# Altium PCB PCB_L1.PcbDoc
Units mm, origin at the board's own origin, x right, y up, seen from the top; angles counter-clockwise.
Board outline 71 x 165 mm, 2 copper layers (Top Layer, Bottom Layer), stack 1.57 mm thick; 38 components, 83 nets, 252 pads, 12 vias.
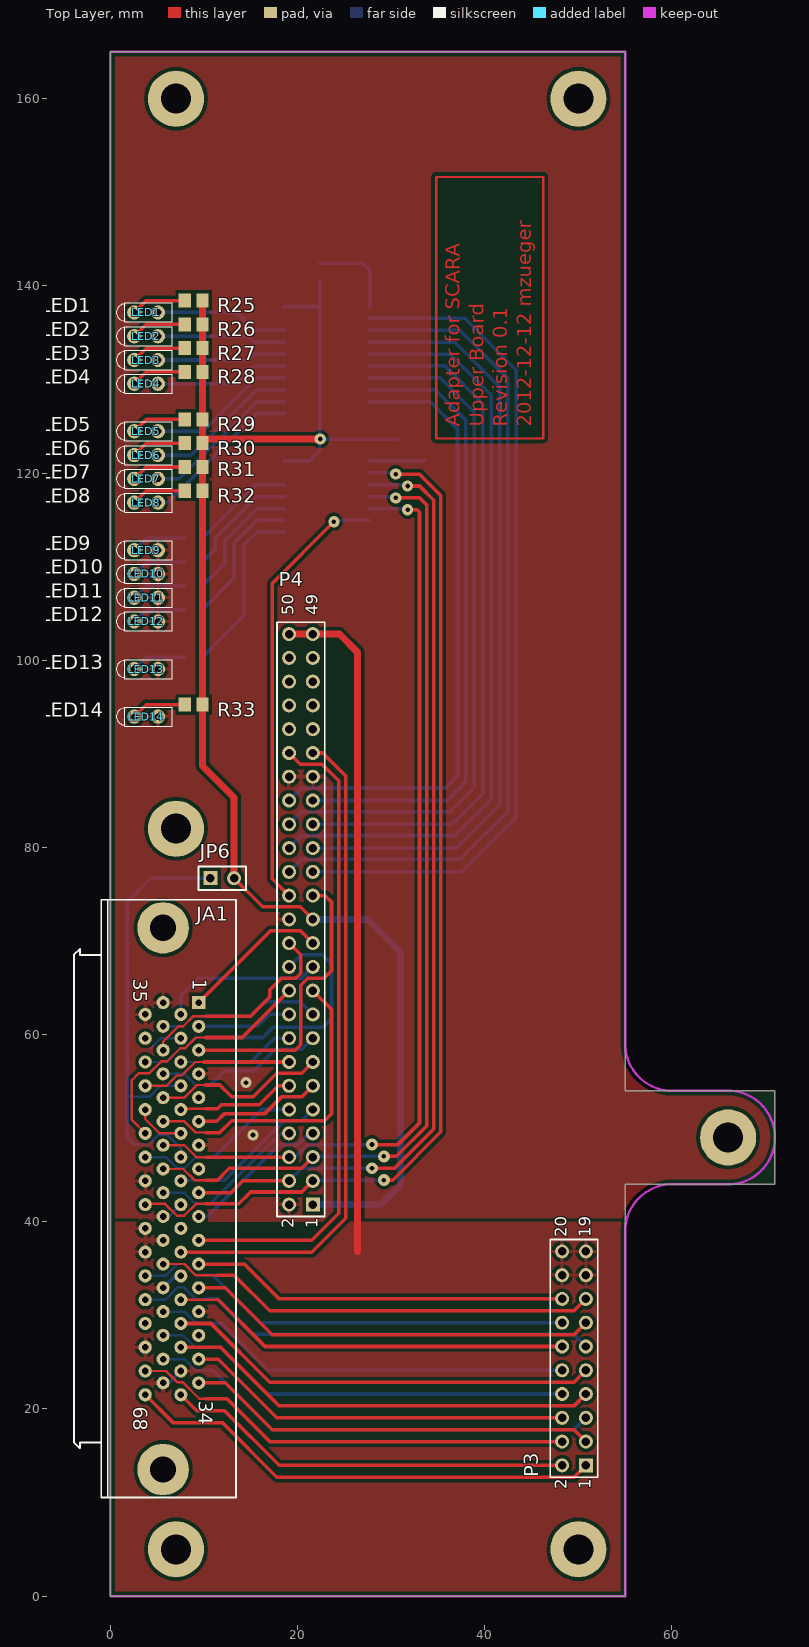
[diagram p0: Top Layer view]
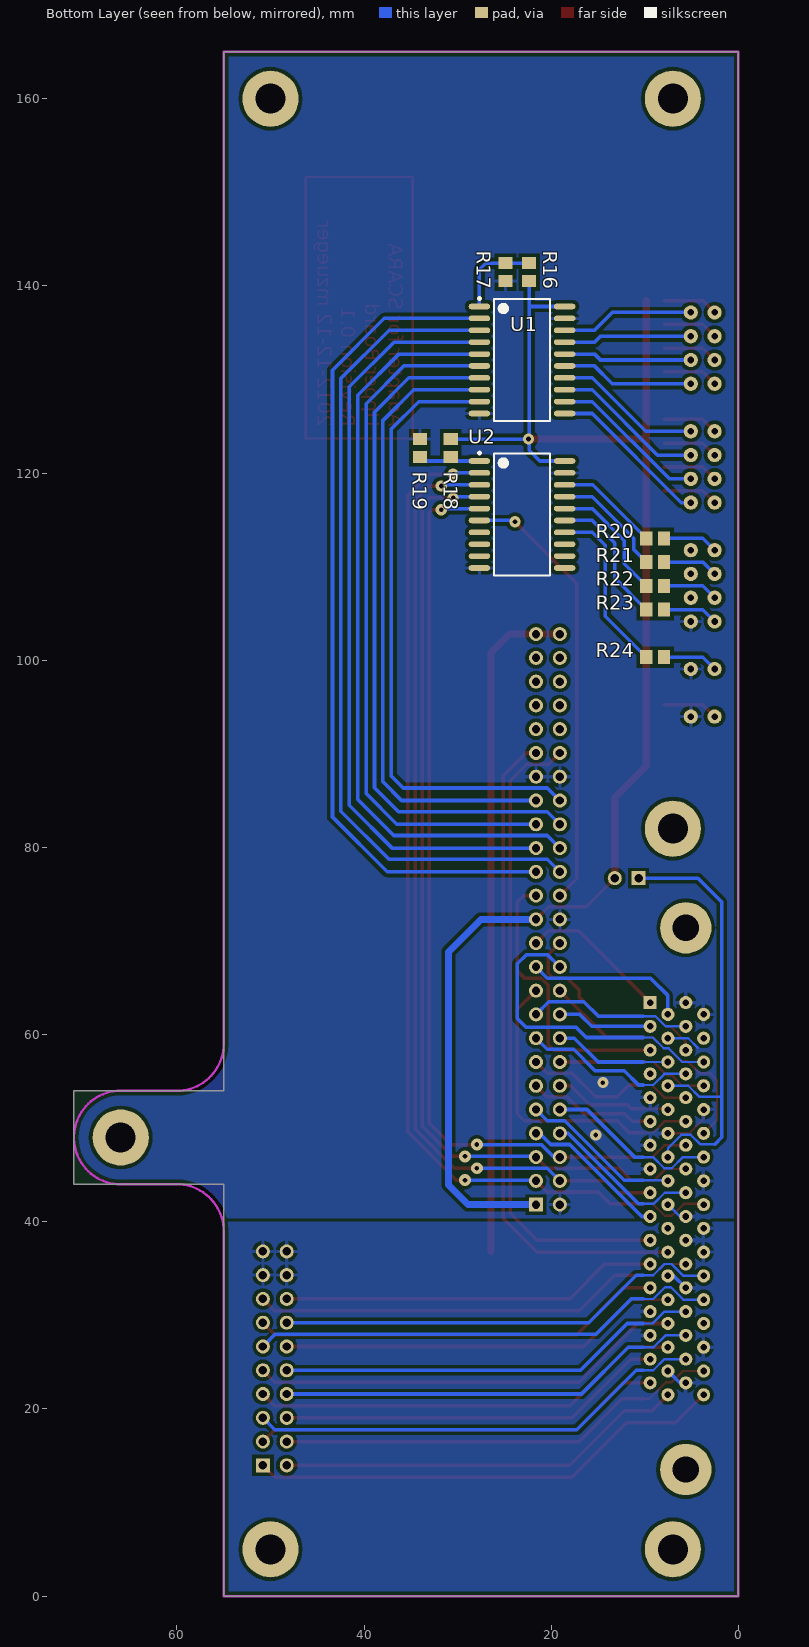
[diagram p1: Bottom Layer view, seen from below]

## Layer stack, top to bottom
Top Layer: signal copper 0.035
Dielectric: core 1.5, FR-4, Dk 4.8
Bottom Layer: signal copper 0.035

## Board outline
0,0 0,165 55,165 55,55 55,54 71,54 71,44 55,44 55,0

## Design rules (kind name [scope] priority, off if disabled: settings)
Clearance Polygon [InPolygon] p1: gap=0.381 // General Polygon Clearance
Clearance [All] p2: gap=0.254
FabricationTestPointUsage TestPointUsage [All] p1 off: valid=0 allowmultiple=FALSE
FabricationTestpoint Testpoint [All] p1 off: side=3 testpointundercomponent=TRUE minsize=1.016 maxsize=2.54 preferedsize=1.524 minholesize=0 maxholesize=1.016 preferedholesize=0.813 testpointgrid=0.025 allowsidetop=TRUE allowsidebottom=TRUE usegrid=TRUE gridtolerance=0
FanoutControl Fanout_BGA [IsBGA] p1 off: bgadir=Out bgaviamode=Centered fanoutstyle=Auto fanoutdirection=Alternating viagrid=0.025 // Fanout_BGA (Default Rule)
FanoutControl Fanout_LCC [IsLCC] p2 off: bgadir=Out bgaviamode=Centered fanoutstyle=Auto fanoutdirection=Alternating viagrid=0.025 // Fanout_LCC (Default Rule)
FanoutControl Fanout_SOIC [IsSOIC] p3 off: bgadir=Out bgaviamode=Centered fanoutstyle=Auto fanoutdirection=Alternating viagrid=0.025 // Fanout_SOIC (Default Rule)
FanoutControl Fanout_Small [(CompPinCount < 5)] p4 off: bgadir=Out bgaviamode=Centered fanoutstyle=Auto fanoutdirection=OutThenIn viagrid=0.025 // Fanout_Small (Default Rule)
FanoutControl Fanout_Default [All] p5 off: bgadir=Out bgaviamode=Centered fanoutstyle=Auto fanoutdirection=Alternating viagrid=0.025 // Fanout_Default (Default Rule)
Height [All] p1 off: minheight=0 maxheight=25.4 prefheight=12.7
HoleSize HoleType [IsPad And HasSquareHole] p1: absolutevalues=TRUE maxlimit=0 minlimit=0 maxpercent=80.000 minpercent=20.000 // Find Square Holes
HoleSize [All] p2: absolutevalues=TRUE maxlimit=5 minlimit=0.4 maxpercent=80.000 minpercent=20.000
LayerPairs [All] p1 off: enforce=TRUE
MinimumAnnularRing "Minimum Annular Ring" [All] p1: minimumring=0.2
PasteMaskExpansion [All] p1: expansion=0.05
PolygonConnect PolygonConnectVia [IsVia] p1: connectstyle=Direct reliefconductorwidth=0.254 reliefentries=4 polygonreliefangle="90 Angle" // Direct Connect Via
PolygonConnect [All] p2: connectstyle=Relief reliefconductorwidth=0.381 reliefentries=4 polygonreliefangle="90 Angle"
RoutingCorners [All] p1 off: cornerstyle=45-Degree minsetback=2.54 maxsetback=2.54
RoutingLayers [All] p1 off: top layer_v5=TRUE bottom layer_v5=TRUE
RoutingPriority [All] p1 off: routingpriority=0
RoutingTopology [All] p1 off: topology=Shortest
RoutingVias [All] p1: holewidth=0.4 width=0.6 viastyle="Through Hole" minholewidth=0.3 minwidth=0.7 maxholewidth=2 maxwidth=3.4
SignalStimulus "#Version Information" [All] p1 off: kind=1 level=0 starttime=10.00n stoptime=60.00n periodtime=100.00n // Version 0-9 from 2010-11-01
SilkToSilkClearance [All] p1 off: silktosilkclearance=0.254
SilkscreenOverComponentPads [All] p1: minsilkscreentomaskgap=0
SolderMaskExpansion [All] p1: expansion=0.05
Width [All] p1: maxlimit=2.54 minlimit=0.254 preferedwidth=0.254 minimp=50.000000 maximp=50.000000 favimp=50.000000
11 further rules are at their usual default settings.

## Components (designator, comment, footprint, x,y, rotation, side; value= is the part's Value field where it differs from the comment)
JA1 "har.mik" "HAR-MIK P/S 68 SA" 9.43,63.42 r270 top
JP6 "Header 1x2" "Header - 1x2 - V" 10.668,76.708 r0 top
LED1 "yellow" KM2520 2.54,137.16 r0 top
LED2 "yellow" KM2520 2.54,134.62 r0 top
LED3 "yellow" KM2520 2.54,132.08 r0 top
LED4 "yellow" KM2520 2.54,129.54 r0 top
LED5 "green" KM2520 2.54,124.46 r0 top
LED6 "green" KM2520 2.54,121.92 r0 top
LED7 "green" KM2520 2.54,119.38 r0 top
LED8 "green" KM2520 2.54,116.84 r0 top
LED9 "red" KM2520 2.54,111.76 r0 top
LED10 "red" KM2520 2.54,109.22 r0 top
LED11 "red" KM2520 2.54,106.68 r0 top
LED12 "red" KM2520 2.54,104.14 r0 top
LED13 "red" KM2520 2.54,99.06 r0 top
LED14 "red" KM2520 2.54,93.98 r0 top
P3 "Header 2x10" "Header - 2x10 - V" 50.8,13.97 r90 top
P4 "Header 2x25" "Header - 2x25 - V" 21.622,41.83 r90 top
R16 "0E" 0805 22.352,141.478 r270 bottom
R17 "N/A" 0805 24.892,141.478 r90 bottom
R18 "0E" 0805 30.734,122.682 r90 bottom
R19 "N/A" 0805 34.036,122.682 r270 bottom
R20 "???" 0805 8.89,113.03 r180 bottom
R21 "???" 0805 8.89,110.49 r180 bottom
R22 "???" 0805 8.89,107.95 r180 bottom
R23 "???" 0805 8.89,105.41 r180 bottom
R24 "???" 0805 8.89,100.33 r180 bottom
R25 "???" 0805 8.89,138.43 r0 top
R26 "???" 0805 8.89,135.89 r0 top
R27 "???" 0805 8.89,133.35 r0 top
R28 "???" 0805 8.89,130.81 r0 top
R29 "???" 0805 8.89,125.73 r0 top
R30 "???" 0805 8.89,123.19 r0 top
R31 "???" 0805 8.89,120.65 r0 top
R32 "???" 0805 8.89,118.11 r0 top
R33 "???" 0805 8.89,95.25 r0 top
U1 "SN74HCT640M" DW020_N 23.114,132.08 r180 bottom
U2 "SN74HCT640M" DW020_N 23.114,115.57 r180 bottom

## Footprints (in the part's own frame and the unit in brackets; to place one, negate y for a bottom-side part, rotate by r counter-clockwise, add the part's x,y. Pads: shape width x height; smd on the part's side, far side on the other; paste and mask are expansions set on the pad)
0805 [mm] "SMD Chip 0805 mil or 2012 mm"
  rect 1.3x1.5 smd: 1(-0.95,0) 2(0.95,0)
DW020_N [mm] "SOIC, 20-Leads, Body 12.8x7.5mm, Pitch 1.27mm, IPC Medium Density"
  oval 2.3x0.6 smd: 1(-4.55,5.715) 2(-4.55,4.445) 3(-4.55,3.175) 4(-4.55,1.905) 5(-4.55,0.635) 6(-4.55,-0.635) 7(-4.55,-1.905) 8(-4.55,-3.175) 9(-4.55,-4.445) 10(-4.55,-5.715) 11(4.55,-5.715) 12(4.55,-4.445) 13(4.55,-3.175) 14(4.55,-1.905) 15(4.55,-0.635) 16(4.55,0.635) 17(4.55,1.905) 18(4.55,3.175) 19(4.55,4.445) 20(4.55,5.715)
  silkscreen extent -4.67,-6.5 3,6.69, body extent -3.75,-6.4 3.75,6.4, height 2.65
"HAR-MIK P/S 68 SA" [mm] "HAR-MIK P/S Connector, 68 Pin, 90 deg"
  rect 1.4x1.4 hole 0.7: 1(0,0)
  round 1.4 hole 0.7: 2(1.27,-1.905) 3(2.54,0) 4(3.81,-1.905) 5(5.08,0) 6(6.35,-1.905) 7(7.62,0) 8(8.89,-1.905) 9(10.16,0) 10(11.43,-1.905) 11(12.7,0) 12(13.97,-1.905) 13(15.24,0) 14(16.51,-1.905) 15(17.78,0) 16(19.05,-1.905) 17(20.32,0) 18(21.59,-1.905) 19(22.86,0) 20(24.13,-1.905) 21(25.4,0) 22(26.67,-1.905) 23(27.94,0) 24(29.21,-1.905) 25(30.48,0) 26(31.75,-1.905) 27(33.02,0) 28(34.29,-1.905) 29(35.56,0) 30(36.83,-1.905) 31(38.1,0) 32(39.37,-1.905) 33(40.64,0) 34(41.91,-1.905) 35(0,-3.81) 36(1.27,-5.715) 37(2.54,-3.81) 38(3.81,-5.715) 39(5.08,-3.81) 40(6.35,-5.715) 41(7.62,-3.81) 42(8.89,-5.715) 43(10.16,-3.81) 44(11.43,-5.715) 45(12.7,-3.81) 46(13.97,-5.715) 47(15.24,-3.81) 48(16.51,-5.715) 49(17.78,-3.81) 50(19.05,-5.715) 51(20.32,-3.81) 52(21.59,-5.715) 53(22.86,-3.81) 54(24.13,-5.715) 55(25.4,-3.81) 56(26.67,-5.715) 57(27.94,-3.81) 58(29.21,-5.715) 59(30.48,-3.81) 60(31.75,-5.715) 61(33.02,-3.81) 62(34.29,-5.715) 63(35.56,-3.81) 64(36.83,-5.715) 65(38.1,-3.81) 66(39.37,-5.715) 67(40.64,-3.81) 68(41.91,-5.715)
  round 5.5 hole 2.8: ""(-7.985,-3.81) ""(49.895,-3.81)
  silkscreen extent -10.98,-13.33 52.89,3.97
"Header - 1x2 - V" [mm] "Connector; Header; 1x2"
  rect 1.5x1.5 hole 0.9: 1(0,0)
  round 1.5 hole 0.9: 2(2.54,0)
  silkscreen extent -1.27,-1.27 3.81,1.27
"Header - 2x10 - V" [mm] "Connector; Header; 10x2 Position"
  rect 1.5x1.5 hole 0.9: 1(0,0)
  round 1.5 hole 0.9: 2(0,2.54) 3(2.54,0) 4(2.54,2.54) 5(5.08,0) 6(5.08,2.54) 7(7.62,0) 8(7.62,2.54) 9(10.16,0) 10(10.16,2.54) 11(12.7,0) 12(12.7,2.54) 13(15.24,0) 14(15.24,2.54) 15(17.78,0) 16(17.78,2.54) 17(20.32,0) 18(20.32,2.54) 19(22.86,0) 20(22.86,2.54)
  silkscreen extent -1.27,-1.27 24.13,3.81
"Header - 2x25 - V" [mm] "Connector; Header; 2x25"
  rect 1.5x1.5 hole 0.9: 1(0,0)
  round 1.5 hole 0.9: 2(0,2.54) 3(2.54,0) 4(2.54,2.54) 5(5.08,0) 6(5.08,2.54) 7(7.62,0) 8(7.62,2.54) 9(10.16,0) 10(10.16,2.54) 11(12.7,0) 12(12.7,2.54) 13(15.24,0) 14(15.24,2.54) 15(17.78,0) 16(17.78,2.54) 17(20.32,0) 18(20.32,2.54) 19(22.86,0) 20(22.86,2.54) 21(25.4,0) 22(25.4,2.54) 23(27.94,0) 24(27.94,2.54) 25(30.48,0) 26(30.48,2.54) 27(33.02,0) 28(33.02,2.54) 29(35.56,0) 30(35.56,2.54) 31(38.1,0) 32(38.1,2.54) 33(40.64,0) 34(40.64,2.54) 35(43.18,0) 36(43.18,2.54) 37(45.72,0) 38(45.72,2.54) 39(48.26,0) 40(48.26,2.54) 41(50.8,0) 42(50.8,2.54) 43(53.34,0) 44(53.34,2.54) 45(55.88,0) 46(55.88,2.54) 47(58.42,0) 48(58.42,2.54) 49(60.96,0) 50(60.96,2.54)
  silkscreen extent -1.27,-1.27 62.23,3.81
KM2520 [mil] "Kinbright KM2520 single"
  round 60 hole 27.56: 1(100,0) 2(0,0)
  silkscreen extent -75,-40 160,40

## Part data
JA1: library part "Connector 68", "TB 60 01 068 5232"
JP6: library part Jumper
LED1 LED2 LED3 LED4 LED5 LED6 LED7 LED8 LED9 LED10 LED11 LED12 LED13 LED14: library part LED, "Typical LED"
P3: "Header, 10-Pin, Dual row"
P4: "Header, 25-Pin, Dual row"
R16 R17 R18 R19 R20 R21 R22 R23 R24 R25 R26 R27 R28 R29 R30 R31 R32 R33: library part R, "Resistor"
U1 U2: library part SN74HCT640DW, "Octal Bus Transceiver with 3-State Outputs"

## Free pads (board coordinates)
  round 6 hole 3.2: 0(7,5) 0(7,82) 0(7,160) 0(50,5) 0(50,160) 0(66,49)

## Via types
v1: diameter 1.2, hole 0.5, Top Layer to Bottom Layer, 8 vias
v2: diameter 1.27, hole 0.5, Top Layer to Bottom Layer, 4 vias

## Nets (pads, with @x,y where several pads share a name; then routed paths per layer and width w, separated by ;. In a path a pad name is that pad's centre, name@x,y a point inside that pad or via, vN(x,y) a via of type N, cw(c..) or ccw(c..) an arc to the next point about the centre after c; other vN are vias at no path point)
AGND: JA1.24 JA1.27 JA1.29 JA1.32 JA1.54 JA1.55 JA1.56 JA1.59 JA1.64 JA1.67 P3.17 P3.18 P3.19 P3.20 P4.49 P4.50 | length 77
  Top Layer w0.762: P4.50 P4.49 24.464,102.79 26.416,100.838 26.416,36.83
  Bottom Layer w0.381: JA1.67 6.255,22.78 JA1.32 ; JA1.59 6.89,34.21 JA1.24
BRAKE_1: P4.29 U1.2 | length 89.9
  Bottom Layer w0.381: P4.29 37.512,77.39 43.37,83.248 43.37,131 37.845,136.525 U1.2
BRAKE_2: P4.30 U1.3 | length 89.2
  Bottom Layer w0.381: P4.30 20.42,78.728 37.326,78.728 42.472,83.874 42.472,130.102 37.319,135.255 U1.3
BRAKE_3: P4.31 U1.4 | length 82.4
  Bottom Layer w0.381: P4.31 37.004,79.93 41.574,84.5 41.574,129.204 36.793,133.985 U1.4
BRAKE_4: P4.32 U1.5 | length 81.8
  Bottom Layer w0.381: P4.32 20.42,81.268 36.818,81.268 40.676,85.126 40.676,128.306 36.267,132.715 U1.5
DGND: JA1.4 JA1.7 JA1.9 JA1.12 JA1.13 JA1.15 JA1.18 JA1.35 JA1.36 JA1.44 JA1.50 JA1.53 LED9.1 LED10.1 LED11.1 LED12.1 LED13.1 LED14.1 P4.2 P4.26 P4.37 P4.38 R17.1 R19.1 U1.10 U1.19 U2.10 U2.19 | length 11.5
  Top Layer w0.254: JA1.44 3.715,50.979 5.244,49.45 JA1.12
  Bottom Layer w0.254: 4.318,58.567 5.361,59.61 JA1.4 ; JA1.53 6.255,40.56 JA1.18
  other v1: 15.24,49.276 14.478,54.864
EN_1: P4.33 U1.6 | length 75
  Bottom Layer w0.381: P4.33 36.496,82.47 39.778,85.752 39.778,127.408 35.741,131.445 U1.6
EN_2: P4.34 U1.7 | length 74.3
  Bottom Layer w0.381: P4.34 20.42,83.808 36.31,83.808 38.88,86.378 38.88,126.51 35.215,130.175 U1.7
EN_3: P4.35 U1.8 | length 67.5
  Bottom Layer w0.381: P4.35 35.988,85.01 37.982,87.004 37.982,125.612 34.689,128.905 U1.8
EN_4: P4.36 U1.9 | length 66.8
  Bottom Layer w0.381: P4.36 20.42,86.348 35.802,86.348 37.084,87.63 37.084,124.714 34.163,127.635 U1.9
ENDSW+_1: JA1.19 P4.7 | length 15.9
  Bottom Layer w0.381: JA1.19 10.334,40.56 18.029,48.255 20.061,48.255 21.256,49.45 P4.7
ENDSW+_2: JA1.16 P4.9 | length 17.1
  Bottom Layer w0.254: JA1.16@7.605,44.45 10.16,44.45
  Bottom Layer w0.381: 10.16,44.45 12.192,44.45 18.537,50.795 20.427,50.795 P4.9
ENDSW+_3: JA1.11 P4.11 | length 13.8
  Top Layer w0.381: JA1.11 11.35,50.72 12.192,51.562 16.51,51.562 18.283,53.335 20.427,53.335 P4.11
ENDSW+_4: JA1.43 P4.13 | length 18.6
  Top Layer w0.254: JA1.43 7.901,53.26 9.251,54.61 10.16,54.61
  Top Layer w0.381: 10.16,54.61 11.684,54.61 12.954,53.34 15.24,53.34 17.775,55.875 20.427,55.875 P4.13
ENDSW-_1: JA1.51 P4.8 | length 17.1
  Bottom Layer w0.254: JA1.51 7.874,43.1 9.064,41.91 10.16,41.91
  Bottom Layer w0.381: 10.16,41.91 10.668,41.91 18.208,49.45 P4.8
ENDSW-_2: JA1.48 P4.10 | length 18.5
  Bottom Layer w0.254: JA1.48 5.922,46.91 7.112,45.72 7.927,45.72 9.117,46.91 10.16,46.91
  Bottom Layer w0.381: 10.16,46.91 11.101,46.91 16.181,51.99 P4.10
ENDSW-_3: JA1.10 P4.12 | length 12.5
  Top Layer w0.254: JA1.10@7.605,52.07 10.16,52.07
  Top Layer w0.381: 10.16,52.07 11.43,52.07 11.849,52.489 15.899,52.489 17.94,54.53 P4.12
ENDSW-_4: JA1.42 P4.14 | length 16.4
  Top Layer w0.254: JA1.42 5.996,54.53 7.092,55.626 7.62,55.626 9.064,57.07 9.986,57.07
  Top Layer w0.381: 9.986,57.07 P4.14
ENSD_1: JA1.37 P4.17 | length 17.6
  Bottom Layer w0.254: JA1.37 7.784,60.88 8.88,61.976 10.16,61.976
  Bottom Layer w0.381: 10.16,61.976 14.986,61.976 16.505,63.495 20.276,63.495 P4.17
ENSD_2: JA1.3 P4.18 | length 10.2
  Bottom Layer w0.381: JA1.3 15.668,60.88 16.938,62.15 P4.18
ENSD_3: JA1.45 P4.19 | length 33.3
  Top Layer w0.254: JA1.45 7.901,50.72 9.091,49.53 10.16,49.53
  Top Layer w0.381: 10.16,49.53 11.684,49.53 12.949,50.795 22.887,50.795 23.622,51.53 23.622,62.69 P4.19
ENSD_4: JA1.46 P4.20 | length 27
  Top Layer w0.254: JA1.46 2.286,50.879 2.286,55.118 3.048,55.88 4.171,55.88 5.441,57.15 6.076,57.15 7.455,58.529 7.973,58.529 9.134,59.69 10.16,59.69
  Top Layer w0.381: 10.16,59.69 14.082,59.69 P4.20
GRIPPER_CLOSE: JA1.6 P4.16 | length 12.6
  Bottom Layer w0.254: JA1.6 10.16,57.07
  Bottom Layer w0.381: 10.16,57.07 14.986,57.07 17.526,59.61 P4.16
GRIPPER_OPEN: JA1.41 P4.15 | length 18.6
  Bottom Layer w0.254: JA1.41 7.901,55.8 9.091,54.61 10.16,54.61
  Bottom Layer w0.381: 10.16,54.61 10.668,54.61 12.192,56.134 15.32,56.134 17.601,58.415 20.427,58.415 P4.15
NetJA1_8: JA1.8 JA1.14 JP6.1 | length 49.3
  Bottom Layer w0.254: 1.778,53.34 4.171,53.34 5.361,54.53 JA1.8 ; 2.54,48.26 4.064,48.26 5.08,49.276 6.096,49.276 7.525,47.847 JA1.14
  Bottom Layer w0.381: 2.54,48.26 1.778,49.022 1.778,53.34 1.778,74.168 4.318,76.708 JP6.1
NetLED1_1: LED1.1 U1.18 | length 14.3
  Bottom Layer w0.381: LED1.1 13.462,137.16 15.367,135.255 U1.18
NetLED1_2: LED1.2 R25.1 | length 5.9
  Top Layer w0.381: LED1.2 3.81,138.43 R25.1
NetLED2_1: LED2.1 U1.17 | length 13.7
  Bottom Layer w0.381: LED2.1 14.732,134.62 15.367,133.985 U1.17
NetLED2_2: LED2.2 R26.1 | length 5.9
  Top Layer w0.381: LED2.2 3.81,135.89 R26.1
NetLED3_1: LED3.1 U1.16 | length 13.7
  Bottom Layer w0.381: LED3.1 14.732,132.08 15.367,132.715 U1.16
NetLED3_2: LED3.2 R27.1 | length 5.9
  Top Layer w0.381: LED3.2 3.81,133.35 R27.1
NetLED4_1: LED4.1 U1.15 | length 14.3
  Bottom Layer w0.381: LED4.1 13.462,129.54 15.367,131.445 U1.15
NetLED4_2: LED4.2 R28.1 | length 5.9
  Top Layer w0.381: LED4.2 3.81,130.81 R28.1
NetLED5_1: LED5.1 U1.14 | length 15.9
  Bottom Layer w0.381: LED5.1 9.906,124.46 15.621,130.175 U1.14
NetLED5_2: LED5.2 R29.1 | length 5.9
  Top Layer w0.381: LED5.2 3.81,125.73 R29.1
NetLED6_1: LED6.1 U1.13 | length 16.4
  Bottom Layer w0.381: LED6.1 8.636,121.92 15.621,128.905 U1.13
NetLED6_2: LED6.2 R30.1 | length 5.9
  Top Layer w0.381: LED6.2 3.81,123.19 R30.1
NetLED7_1: LED7.1 U1.12 | length 16.9
  Bottom Layer w0.381: LED7.1 7.366,119.38 15.621,127.635 U1.12
NetLED7_2: LED7.2 R31.1 | length 5.9
  Top Layer w0.381: LED7.2 3.81,120.65 R31.1
NetLED8_1: LED8.1 U1.11 | length 17.4
  Bottom Layer w0.381: LED8.1 6.096,116.84 15.621,126.365 U1.11
NetLED8_2: LED8.2 R32.1 | length 5.9
  Top Layer w0.381: LED8.2 3.81,118.11 R32.1
NetLED9_2: LED9.2 R20.2 | length 5.9
  Bottom Layer w0.381: LED9.2 3.81,113.03 R20.2
NetLED10_2: LED10.2 R21.2 | length 5.9
  Bottom Layer w0.381: LED10.2 3.81,110.49 R21.2
NetLED11_2: LED11.2 R22.2 | length 5.9
  Bottom Layer w0.381: LED11.2 3.81,107.95 R22.2
NetLED12_2: LED12.2 R23.2 | length 5.9
  Bottom Layer w0.381: LED12.2 3.81,105.41 R23.2
NetLED13_2: LED13.2 R24.2 | length 5.9
  Bottom Layer w0.381: LED13.2 3.81,100.33 R24.2
NetLED14_2: LED14.2 R33.1 | length 5.9
  Top Layer w0.381: LED14.2 3.81,95.25 R33.1
NetR16_1: R16.1 R17.2 U1.1 | length 9.6
  Bottom Layer w0.381: R16.1 26.99,142.428 27.686,141.732 U1.1@27.686,137.795
NetR18_1: R18.1 R19.2 U2.1 | length 5.9
  Bottom Layer w0.381: U2.1 R19.2@33.589,121.285
NetR20_1: R20.1 U2.18 | length 11.1
  Bottom Layer w0.381: R20.1 15.555,118.745 U2.18
NetR21_1: R21.1 U2.17 | length 12.3
  Bottom Layer w0.381: R21.1 11.176,111.826 11.176,113.03 15.621,117.475 U2.17
NetR22_1: R22.1 U2.16 | length 13.6
  Bottom Layer w0.381: R22.1 12.192,110.302 12.192,112.776 15.621,116.205 U2.16
NetR23_1: R23.1 U2.15 | length 14.9
  Bottom Layer w0.381: R23.1 13.208,108.778 13.208,112.522 15.621,114.935 U2.15
NetR24_1: R24.1 U2.14 | length 18.7
  Bottom Layer w0.381: R24.1 14.224,104.714 14.224,112.268 15.621,113.665 U2.14
RAI_B1: JA1.68 P3.1 | length 51.3
  Top Layer w0.381: JA1.68 6.683,18.542 11.938,18.542 17.78,12.7 49.53,12.7 P3.1
RAI_B2: JA1.33 P3.3 | length 44
  Top Layer w0.381: JA1.33 12.272,22.78 17.272,17.78 49.53,17.78 P3.3
RAI_B3: JA1.65 P3.5 | length 48.8
  Bottom Layer w0.254: JA1.65 7.901,25.32 9.091,24.13 10.16,24.13
  Bottom Layer w0.381: 10.16,24.13 10.922,24.13 17.272,17.78 49.53,17.78 P3.5
RAI_B4: JA1.30 P3.7 | length 46.4
  Top Layer w0.381: JA1.30 11.764,26.59 18.034,20.32 49.53,20.32 P3.7
RAI_B5: JA1.28 P3.9 | length 46.4
  Top Layer w0.381: JA1.28 10.748,29.13 17.018,22.86 49.53,22.86 P3.9
RAI_B6: JA1.60 P3.11 | length 50.3
  Bottom Layer w0.254: JA1.60 5.879,31.67 7.229,33.02 7.821,33.02 9.091,31.75 10.16,31.75
  Bottom Layer w0.381: 10.16,31.75 11.43,31.75 15.18,28 49.47,28 P3.11
RAI_B7: JA1.25 P3.13 | length 44
  Top Layer w0.381: JA1.25 12.272,32.94 17.272,27.94 49.53,27.94 P3.13
RAI_B8: JA1.57 P3.15 | length 47.8
  Top Layer w0.254: JA1.57 7.901,35.48 9.091,34.29 11.43,34.29
  Top Layer w0.381: 11.43,34.29 13.208,34.29 17.018,30.48 49.53,30.48 P3.15
RAI_B9: JA1.34 P3.2 | length 43.9
  Top Layer w0.381: JA1.34 9.223,19.812 12.192,19.812 18.034,13.97 P3.2
RAI_B10: JA1.66 P3.4 | length 47.7
  Top Layer w0.254: JA1.66 5.922,24.05 7.112,22.86 7.704,22.86 9.482,21.082 10.16,21.082
  Top Layer w0.381: 10.16,21.082 12.446,21.082 17.018,16.51 P3.4
RAI_B11: JA1.31 P3.6 | length 41.4
  Top Layer w0.381: JA1.31 11.51,25.32 17.78,19.05 P3.6
RAI_B12: JA1.63 P3.8 | length 45.2
  Bottom Layer w0.254: JA1.63 7.784,27.86 9.054,26.59 10.16,26.59
  Bottom Layer w0.381: 10.16,26.59 11.764,26.59 16.764,21.59 P3.8
RAI_B13: JA1.61 P3.10 | length 45.2
  Bottom Layer w0.254: JA1.61 7.901,30.4 9.171,29.13 10.16,29.13
  Bottom Layer w0.381: 10.16,29.13 11.87,29.13 16.87,24.13 P3.10
RAI_B14: JA1.26 P3.12 | length 42.8
  Top Layer w0.254: JA1.26 11.51,31.67
  Top Layer w0.381: 11.51,31.67 16.51,26.67 P3.12
RAI_B15: JA1.58 P3.14 | length 47.7
  Bottom Layer w0.254: JA1.58 5.879,34.21 7.149,35.48 7.901,35.48 9.091,34.29 10.16,34.29
  Bottom Layer w0.381: 10.16,34.29 10.922,34.29 16.002,29.21 P3.14
RAI_B16: JA1.23 P3.16 | length 40.4
  Top Layer w0.381: JA1.23 14.304,35.48 18.034,31.75 P3.16
READY_1: JA1.52 P4.3 U2.2 | length 112.5
  Top Layer w0.254: JA1.52 3.795,41.91 5.842,41.91 7.112,40.64 7.874,40.64 9.144,41.91 10.16,41.91
  Top Layer w0.381: 10.16,41.91 13.716,41.91 14.981,43.175 20.427,43.175 P4.3 ; v2(29.21,44.45) 30.157,44.45 35.306,49.599 35.306,117.602 33.02,119.888 v1(30.48,119.888)
  Bottom Layer w0.381: P4.3 21.702,44.45 v2(29.21,44.45) ; U2.2 v1@30.48,120.015
READY_2: JA1.17 P4.4 U2.3 | length 102.6
  Top Layer w0.381: JA1.17 12.874,43.1 14.144,44.37 P4.4 ; v2(27.94,45.72) 30.349,45.72 34.544,49.915 34.544,117.094 33.02,118.618 v1(31.75,118.618)
  Bottom Layer w0.381: P4.4 20.427,45.715 v2@27.935,45.715 ; U2.3 v1@31.75,118.745
READY_3: JA1.49 P4.5 U2.4 | length 103.7
  Top Layer w0.254: JA1.49 7.784,45.64 8.974,44.45 10.16,44.45
  Top Layer w0.381: 10.16,44.45 11.43,44.45 12.695,45.715 20.427,45.715 P4.5 ; v2(29.21,46.99) 30.542,46.99 33.782,50.23 33.782,116.586 33.02,117.348 v1(30.48,117.348)
  Bottom Layer w0.381: P4.5 21.702,46.99 v2(29.21,46.99) ; U2.4 v1@30.353,117.475
READY_4: JA1.47 P4.6 U2.5 | length 100
  Top Layer w0.254: JA1.47 7.901,48.18 9.171,46.91 10.24,46.91
  Top Layer w0.381: 10.24,46.91 P4.6 ; v2(27.94,48.248) 30.722,48.248 33.02,50.546 33.02,115.824 32.766,116.078 v1(31.75,116.078)
  Bottom Layer w0.381: P4.6 19.732,46.91 21.07,48.248 v2(27.94,48.248) ; U2.5 v1@31.623,116.205
SDCC_1: JA1.2 P4.21 | length 17.4
  Bottom Layer w0.381: JA1.2 7.525,64.167 9.386,66.028 20.42,66.028 P4.21
SDCC_2: JA1.40 P4.22 | length 33.2
  Bottom Layer w0.254: JA1.40 5.996,57.07 7.455,58.529 7.983,58.529 9.144,59.69 10.16,59.69
  Bottom Layer w0.381: 10.16,59.69 16.256,59.69 17.371,60.805 22.705,60.805 23.622,61.722 23.622,67.564 22.646,68.54 20.392,68.54 P4.22
SDCC_3: JA1.1 P4.23 | length 15.9
  Top Layer w0.381: JA1.1 17.125,71.115 20.276,71.115 P4.23
SDCC_4: JA1.39 P4.24 | length 22.8
  Top Layer w0.254: JA1.39 5.62,59.234 7.266,60.88 7.784,60.88 8.88,61.976 10.16,61.976
  Top Layer w0.381: 10.16,61.976 14.986,61.976 17.018,64.008 17.018,64.77 18.276,66.028 19.8,66.028 20.32,66.548 20.32,68.532 P4.24
SETVAL3: JA1.22 P4.39 | length 70.9
  Top Layer w0.381: JA1.22 21.51,36.75 25.146,40.386 25.146,87.63 22.686,90.09 P4.39
SETVAL4: JA1.21 P4.40 | length 68.9
  Top Layer w0.381: JA1.21 21.51,38.02 24.384,40.894 24.384,87.122 22.611,88.895 21.127,88.895 21.123,88.9 20.272,88.9 P4.40
VCC: JP6.2 P4.1 P4.25 R16.2 R18.2 R25.2 R26.2 R27.2 R28.2 R29.2 R30.2 R31.2 R32.2 R33.2 U1.20 U2.20 | length 165.9
  Top Layer w0.381: JP6.2 16.261,73.655 20.276,73.655 P4.25
  Top Layer w0.762: R25.2 R26.2 R27.2 R28.2 R29.2 R30.2 R31.2 R32.2 9.84,88.712 13.208,85.344 JP6.2 ; R30.2@10.282,123.632 v1(22.418,123.632)
  Bottom Layer w0.381: U2.20 21.209,121.285 22.352,122.428 22.352,137.795 ; U1.20 22.352,137.795 ; R16.2 22.352,137.795 ; v1(22.418,123.632) R18.2
  Bottom Layer w0.762: P4.1 28.876,41.83 30.988,43.942 30.988,68.834 27.512,72.31 P4.25
WD: JA1.5 P4.27 | length 31.1
  Top Layer w0.381: JA1.5 19.732,58.34 20.32,58.928 20.32,65.278 21.077,66.035 22.117,66.035 22.121,66.04 22.86,66.04 23.622,66.802 23.622,74.168 22.94,74.85 P4.27
WD_STATUS: P4.28 U2.6 | length 47.1
  Top Layer w0.381: P4.28 17.272,76.66 17.272,108.204 v1(23.876,114.808)
  Bottom Layer w0.381: v1@24.003,114.935 U2.6
pads on no net: JA1. JA1.20 JA1.38 JA1.62 P4.41 P4.42 P4.43 P4.44 P4.45 P4.46 P4.47 P4.48 U2.7 U2.8 U2.9 U2.11 U2.12 U2.13
copper on no net: | length 78.7
  Top Layer w0.254: 34.798,123.698 46.228,123.698 46.228,151.638 34.798,151.638 34.798,123.698

## Polygon pours and split planes (outlines as drawn)
DGND on Top Layer "Top Layer-DGND" (solid, remove dead copper, pour order 10): 55,40 59,44 60,44 71,44 71,54 60,54 55,59 55,165 0,165 0,40
AGND on Top Layer "Top Layer-AGND" (solid, remove dead copper, pour order 4): 0,0 55,0 55,40 0,40
DGND on Bottom Layer "Bottom Layer-DGND" (solid, remove dead copper, pour order 8): 55,40 59,44 60,44 71,44 71,54 60,54 55,59 55,60 55,165 0,165 0,40
AGND on Bottom Layer "Bottom Layer-AGND" (solid, remove dead copper, pour order 2): 0,40 55,40 55,0 0,0

## Keep-outs
Keep-Out Layer:
  lines w0.254: 0,0 0,165 55,165 55,59 ccw(c60,59) 60,54 66,54 cw(c66,49) 66,44 60,44 ccw(c60,39) 55,39 55,0 0,0

## Other copper
Top Layer:
  text "Adapter for SCARA" at 37.338,124.968 h1.52 r90
  text "Upper Board" at 39.878,124.968 h1.52 r90
  text "Revision 0.1" at 42.418,124.968 h1.52 r90
  text "2012-12-12 mzueger" at 44.958,124.968 h1.52 r90

## Silkscreen, mask and mechanical layers (free items; w line width, h text height)
Mechanical 1:
  lines w0: 0,0 0,165 55,165 55,59 ccw(c60,59) 60,54 66,54 cw(c66,49) 66,44 60,44 ccw(c60,39) 55,39 55,0 0,0

## Text inside footprints (layer, text, board x,y; h text height)
JA1: Top Overlay "35" at 2.445,65.96 h1.5 r270; Top Overlay "68" at 2.445,20.24 h1.5 r270; Top Overlay "34" at 9.43,20.875 h1.5 r270; Top Overlay "1" at 8.795,65.96 h1.5 r270
P3: Top Overlay "20" at 48.768,38.354 h1.27 r90; Top Overlay "19" at 51.308,38.354 h1.27 r90; Top Overlay "1" at 51.308,11.43 h1.27 r90; Top Overlay "2" at 48.768,11.43 h1.27 r90
P4: Top Overlay "50" at 19.59,104.822 h1.27 r90; Top Overlay "49" at 22.13,104.822 h1.27 r90; Top Overlay "1" at 22.13,39.29 h1.27 r90; Top Overlay "2" at 19.59,39.29 h1.27 r90